# EAGLE board Integrated_final (EAGLE 9.5.2)
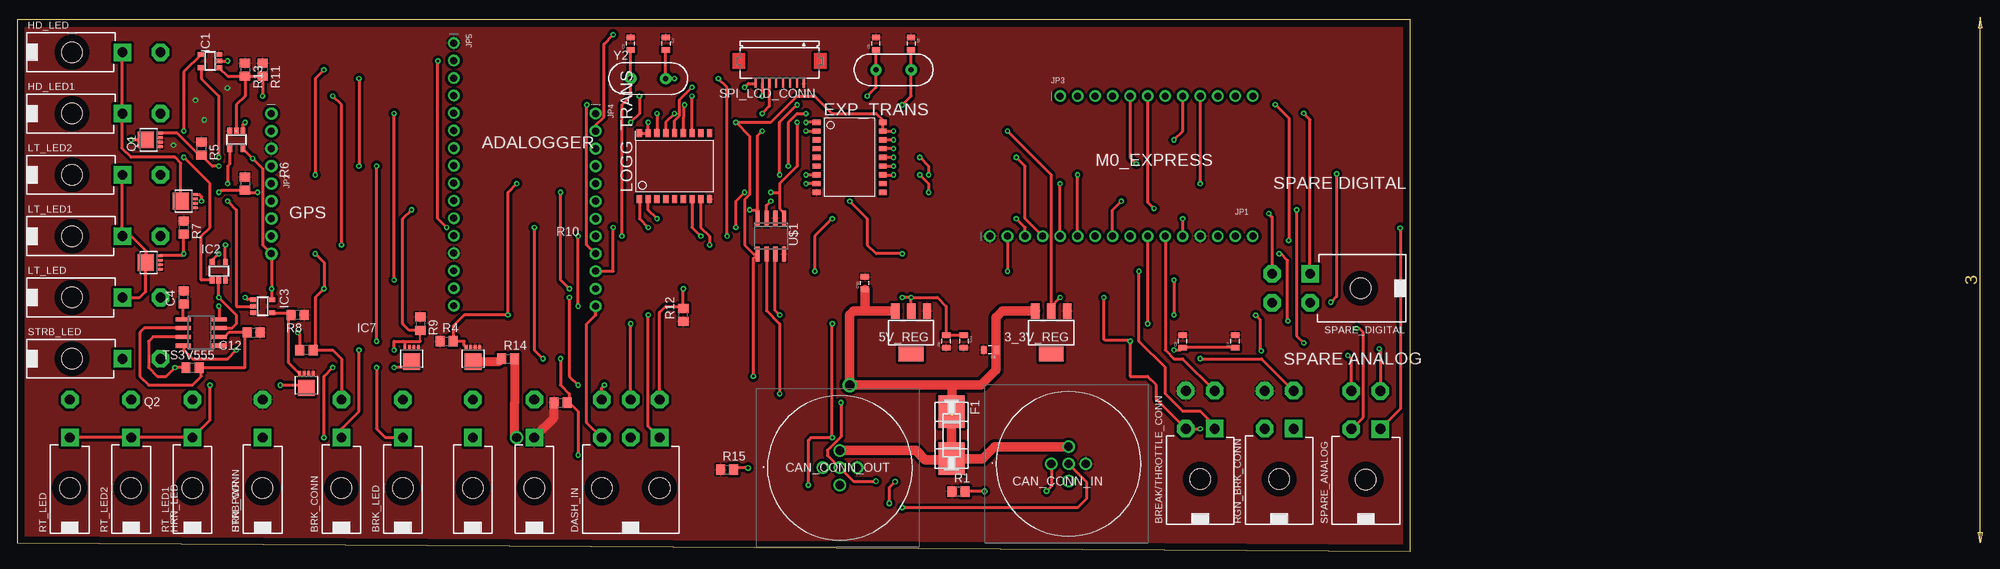
[diagram p0: board, top side]
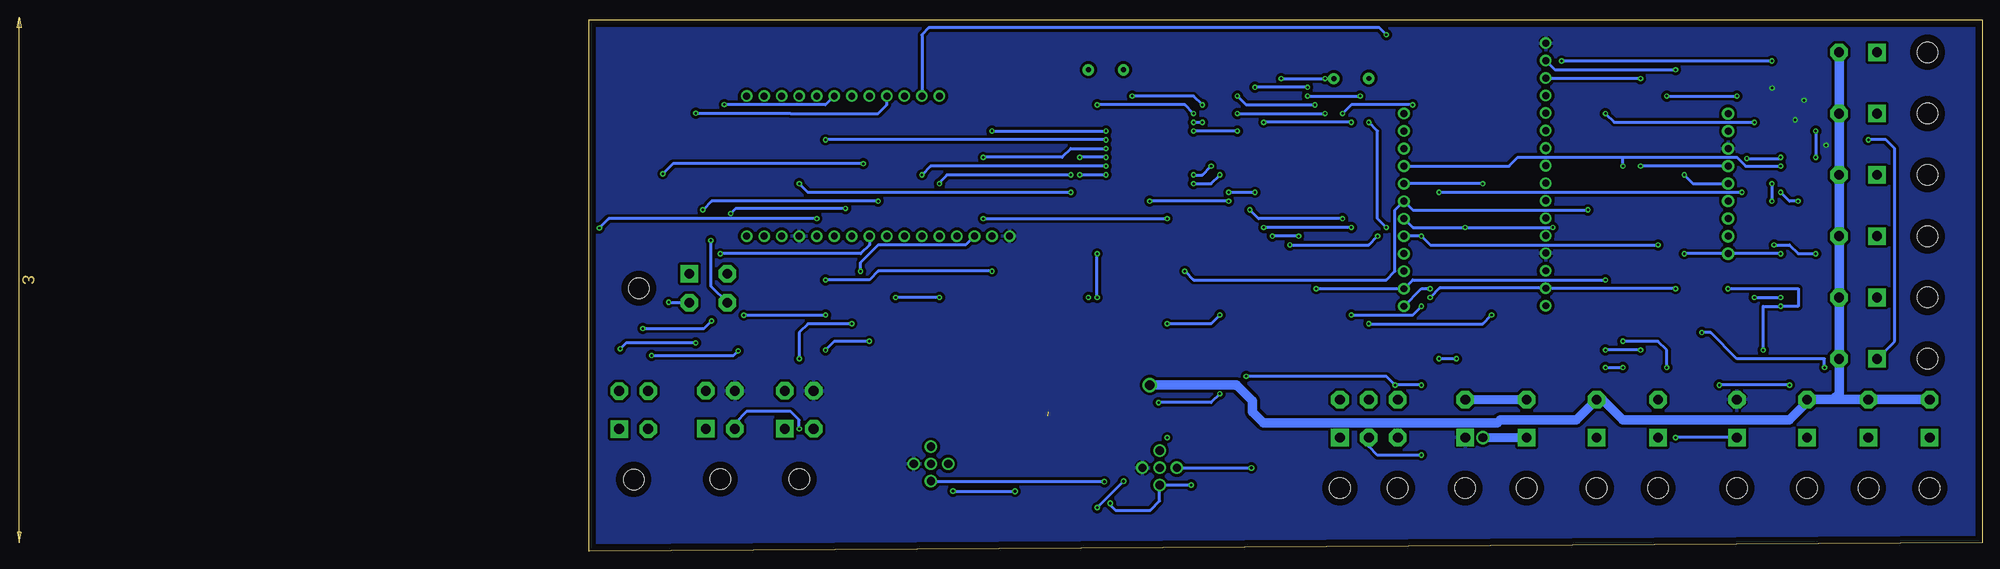
[diagram p1: board, bottom side, seen from below]

Size 201.91 x 77.14 mm. Coordinates in mm from the lower left corner, seen from the top.
Outline: 0,1.27 201.91,0 201.91,77.14 0,77.14 0,1.27
Copper layers (1*16): Top 0.035mm / dielectric 1.5mm / Bottom 0.035mm
Design rules "default": minimum track width 6mil, minimum drill 0.35mm, track to track 6mil, track to pad 6mil, pad to pad 6mil, via to via 6mil, smd to smd 6mil, copper to edge 40mil, drill to drill 6mil, minimum pad ring 10mil, minimum via ring 8mil, stop-mask expansion 4mil, vias tented up to drill 0mil, thermal gap 10mil

## Footprints (pad centres in the part's own frame; a part is rotated, then mirrored left to right if it is on the bottom)
SOT223 = smd 1.219 x 2.235: 1 -2.311,-3.099; 2 0,-3.099; 3 2.311,-3.099 | smd 3.6 x 2.2: 4 0,3.099
39-30-?04? = drill 1.422 pad 2.54 square: 1 2.095,0 | drill 1.422 pad 2.54 octagon: 2 -2.095,0; 3 2.095,5.512; 4 -2.095,5.512 | hole 3: 0,-7.3
39-30-?02? = drill 1.422 pad 2.54 square: 1 0,0 | drill 1.422 pad 2.54 octagon: 2 0,5.512 | hole 3: 0,-7.3
0805 = smd 0.8 x 1.2: 1 -0.9,0; 2 0.9,0
C0805 = smd 1.3 x 1.5: 1 -0.95,0; 2 0.95,0
1200845179 = drill 1.2 pad 1.8: 1 0,0; 2 2.5,2.5; 3 5,0; 4 2.5,-2.5; 5 2.5,0
39-30-?06? = drill 1.422 pad 2.54 square: 1 4.191,0 | drill 1.422 pad 2.54 octagon: 2 0,0; 3 -4.191,0; 4 4.191,5.512; 5 0,5.512; 6 -4.191,5.512 | hole 3: -4.191,-7.3; 4.191,-7.3
SO-18W = smd 0.762 x 1.143: 1 -5.08,-4.788; 2 -3.81,-4.788; 3 -2.54,-4.788; 4 -1.27,-4.788; 5 0,-4.788; 6 1.27,-4.788; 7 2.54,-4.788; 8 3.81,-4.788; 9 5.08,-4.788; 10 5.08,4.788; 11 3.81,4.788; 12 2.54,4.788; 13 1.27,4.788; 14 0,4.788; 15 -1.27,4.788; 16 -2.54,4.788; 17 -3.81,4.788; 18 -5.08,4.788
OMNIBLOK = smd 4.7 x 3.8: P$1 -3.4,0; P$2 3.4,0
SOT23-5 = smd 0.69 x 0.99: 1 -0.95,-1.29; 2 0,-1.29; 3 0.95,-1.29; 4 0.95,1.3; 5 -0.95,1.3
1X16_ROUND = drill 1 pad 1.676: 1 -19.05,0; 2 -16.51,0; 3 -13.97,0; 4 -11.43,0; 5 -8.89,0; 6 -6.35,0; 7 -3.81,0; 8 -1.27,0; 9 1.27,0; 10 3.81,0; 11 6.35,0; 12 8.89,0; 13 11.43,0; 14 13.97,0; 15 16.51,0; 16 19.05,0
1X09_ROUND_70 = drill 1 pad 1.778: 1 -10.16,0; 2 -7.62,0; 3 -5.08,0; 4 -2.54,0; 5 0,0; 6 2.54,0; 7 5.08,0; 8 7.62,0; 9 10.16,0
1X12_ROUND = drill 1 pad 1.676: 1 -13.97,0; 2 -11.43,0; 3 -8.89,0; 4 -6.35,0; 5 -3.81,0; 6 -1.27,0; 7 1.27,0; 8 3.81,0; 9 6.35,0; 10 8.89,0; 11 11.43,0; 12 13.97,0
LFPAK33 = smd 0.4 x 0.8: 1 -0.975,-1.625; 2 -0.325,-1.625; 3 0.325,-1.625; 4 0.975,-1.625 | smd 2.45 x 2.35: MB 0,0.425
R0805 = smd 1.3 x 1.5: 1 -0.95,0; 2 0.95,0
FH12-08S-1SH = smd 0.3 x 1.3: 1 -3.5,3.25; 2 -2.5,3.25; 3 -1.5,3.25; 4 -0.5,3.25; 5 0.5,3.25; 6 1.5,3.25; 7 2.5,3.25; 8 3.5,3.25
SO08 = smd 0.6 x 2.2: 1 -1.905,-2.6; 2 -0.635,-2.6; 3 0.635,-2.6; 4 1.905,-2.6; 5 1.905,2.6; 6 0.635,2.6; 7 -0.635,2.6; 8 -1.905,2.6
SOIC8 = smd 0.6 x 2.2: 1 -1.905,-2.6; 2 -0.635,-2.6; 3 0.635,-2.6; 4 1.905,-2.6; 5 1.905,2.6; 6 0.635,2.6; 7 -0.635,2.6; 8 -1.905,2.6
HC49US = drill 0.7 pad 1.651: 1 -2.54,0; 2 2.54,0

## Placement (x,y rotation side)
3_3V_REG  NCP1117ST33T3G  [SOT223]  149.86,31.75 180 top
5V_REG  NCP1117ST50T3G  [SOT223]  129.54,31.75 180 top
BREAK/THROTTLE_CONN  39-30-04?  [39-30-?04?]  171.45,17.78 0 top
BRK_CONN  39-30-02?  [39-30-?02?]  46.99,16.51 0 top
BRK_LED  39-30-02?  [39-30-?02?]  55.88,16.51 0 top
C1  18 pF  [0805]  93.98,73.66 270 top
C2  18 pF  [0805]  88.9,73.66 90 top
C3  10µF  [0805]  140.97,29.21 180 top
C4  10nF  [C0805]  24.13,36.83 90 top
C5  18 pF  [0805]  129.54,73.66 270 top
C6  18 pF  [0805]  124.46,73.66 90 top
C7  .1µF  [0805]  176.53,30.48 90 top
C8  .1µF  [0805]  134.62,30.48 90 top
C9  10µF  [0805]  168.91,30.48 90 top
C10  10µF  [0805]  122.83,38.92 90 top
C11  10µF  [0805]  137.16,30.48 270 top
C12  2.2uF  [C0805]  34.29,31.75 0 top
CAN_CONN_IN  1200845179  [1200845179]  149.86,12.7 0 top
CAN_CONN_OUT  1200845179  [1200845179]  116.72,12.14 0 top
DASH_IN  39-30-06?  [39-30-?06?]  88.9,16.51 0 top
EXP_TRANS  MCP2515  [SO-18W]  120.65,57.15 270 top
F1  SMD-MICRO-FUSE-BLOCK  [OMNIBLOK]  135.4,16.85 270 top
HD_LED  39-30-02?  [39-30-?02?]  15.24,72.39 270 top
HD_LED1  39-30-02?  [39-30-?02?]  15.24,63.5 270 top
HRN_LED  39-30-02?  [39-30-?02?]  66.04,16.51 0 top
HRN_PWR  39-30-02?  [39-30-?02?]  74.93,16.51 0 top
IC1  74AHC1G32DBV  [SOT23-5]  27.94,71.12 90 top
IC2  74AHC1G08DBV  [SOT23-5]  29.21,40.64 0 top
IC3  74AHC1G08DBV  [SOT23-5]  35.56,35.56 270 top
IC7  74AHC1G32DBV  [SOT23-5]  31.75,59.69 180 top
JP1  [1X16_ROUND]  160.02,45.72 0 top
JP2  [1X09_ROUND_70]  36.83,53.34 270 top
JP3  [1X12_ROUND]  165.1,66.04 0 top
JP4  [1X12_ROUND]  83.82,49.53 270 top
JP5  [1X16_ROUND]  63.27,54.68 270 top
LOGG_TRANS  MCP2515  [SO-18W]  95.25,55.88 0 top
LT_LED  39-30-02?  [39-30-?02?]  15.24,36.83 270 top
LT_LED1  39-30-02?  [39-30-?02?]  15.24,45.72 270 top
LT_LED2  39-30-02?  [39-30-?02?]  15.24,54.61 270 top
Q1  PSMN013-30MLC  [LFPAK33]  19.05,59.69 90 top
Q2  PSMN013-30MLC  [LFPAK33]  41.91,24.13 180 top
Q3  PSMN013-30MLC  [LFPAK33]  66.04,27.94 180 top
Q4  PSMN013-30MLC  [LFPAK33]  19.05,41.91 90 top
Q5  PSMN013-30MLC  [LFPAK33]  57.15,27.94 180 top
Q6  PSMN013-30MLC  [LFPAK33]  24.13,50.8 90 top
R1  0  [R0805]  136.39,8.71 0 top
R2  220K  [R0805]  25.4,26.67 0 top
R3  100K  [R0805]  41.91,29.21 180 top
R4  1K  [R0805]  62.23,30.48 0 top
R5  1K  [R0805]  26.67,58.42 270 top
R6  1K  [R0805]  33.02,53.34 270 top
R7  1K  [R0805]  24.13,46.99 270 top
R8  1K  [R0805]  40.64,34.29 180 top
R9  1K  [R0805]  58.42,33.02 270 top
R10  1K  [R0805]  78.74,21.59 0 top
R11  1K  [R0805]  35.56,69.85 270 top
R12  1K  [R0805]  96.52,34.29 90 top
R13  1K  [R0805]  33.02,69.85 270 top
R14  1K  [R0805]  71.12,27.94 0 top
R15  0  [R0805]  102.85,11.87 0 top
RGN_BRK_CONN  39-30-04?  [39-30-?04?]  182.88,17.78 0 top
RT_LED  39-30-02?  [39-30-?02?]  7.62,16.51 0 top
RT_LED1  39-30-02?  [39-30-?02?]  25.4,16.51 0 top
RT_LED2  39-30-02?  [39-30-?02?]  16.51,16.51 0 top
SPARE_ANALOG  39-30-04?  [39-30-?04?]  195.45,17.75 0 top
SPARE_DIGITAL  39-30-04?  [39-30-?04?]  187.38,38.17 90 top
SPI_LCD_CONN  FH12-08S-1SH  [FH12-08S-1SH]  110.49,71.12 180 top
STRB_CONN  39-30-02?  [39-30-?02?]  35.56,16.51 0 top
STRB_LED  39-30-02?  [39-30-?02?]  15.24,27.94 270 top
TS3V555  LM555D  [SO08]  26.67,31.75 90 top
U$1  MCP2562  [SOIC8]  109.22,45.72 180 top
Y1  [HC49US]  127,69.85 0 top
Y2  [HC49US]  91.44,68.58 359.6 top

## Library data of the parts
3_3V_REG 5V_REG EXP_TRANS LOGG_TRANS U$1 = NUSOLAR_Custom
BREAK/THROTTLE_CONN BRK_CONN BRK_LED DASH_IN HD_LED HD_LED1 HRN_LED HRN_PWR LT_LED LT_LED1 LT_LED2 RGN_BRK_CONN RT_LED RT_LED1 RT_LED2 SPARE_ANALOG SPARE_DIGITAL STRB_CONN STRB_LED = con-molex-mini-fit
C1-C3 C5-C11 = SparkFun-Capacitors
C4 C12 = eagle-ltspice; SPICEMODEL: NONE; SPICEPREFIX: C
CAN_CONN_IN CAN_CONN_OUT = SamacSys_Parts; DESCRIPTION: REC U12 5P AC FE M16 BM SOL SHD; HEIGHT: 24.8mm; MANUFACTURER_NAME: Molex; MANUFACTURER_PART_NUMBER: 1200845179; MOUSER_PART_NUMBER: 538-1200845179; MOUSER_PRICE-STOCK: https://www.mouser.com/Search/Refine.aspx?Keyword=538-1200845179
F1 = f-lf-omniblok-s
IC1-IC3 IC7 = 74xx-little-us
JP1-JP5 = microbuilder
Q1-Q6 = transistor-power; MPN: PSMN013-30MLC; OC_FARNELL: 2115260; OC_NEWARK: 05W5709
R1-R15 = rcl
SPI_LCD_CONN = con-hirose; OC_FARNELL: unknown; OC_NEWARK: unknown
TS3V555 = linear
Y1 Y2 = SparkFun-FreqCtrl

## Nets
1PPS: JP2.1
3.3V: 3_3V_REG.2 BREAK/THROTTLE_CONN.2 BRK_CONN.2 C7.1 C9.1 DASH_IN.6 EXP_TRANS.17 EXP_TRANS.18 IC1.5 IC2.5 IC3.5 IC7.5 JP2.9 JP5.15 LOGG_TRANS.17 LOGG_TRANS.18 R3.1 RGN_BRK_CONN.2 TS3V555.4 TS3V555.8 U$1.5
5V: 5V_REG.2 C8.2 C11.1 U$1.3
12V: 3_3V_REG.3 5V_REG.3 BRK_LED.2 C3.1 C10.1 CAN_CONN_IN.2 CAN_CONN_OUT.2 F1.P$1 F1.P$2 HD_LED1.2 HD_LED.2 LT_LED1.2 LT_LED2.2 LT_LED.2 RT_LED1.2 RT_LED2.2 RT_LED.2 STRB_LED.2
!RESET: JP1.16
!RESET_LOG: JP5.16
A0: JP1.12 SPARE_ANALOG.1
A0(LOG): JP5.12
A1(LOG): JP5.11
A2(LOG): JP5.10
A3: JP1.9 SPARE_ANALOG.2
A3(LOG): JP5.9
A4: JP1.8 SPARE_ANALOG.3
A4(LOG): JP5.8
A5: JP1.7
A5(LOG): JP5.7
AREF: JP1.14
AREF_LOG: JP5.14
BRK: BREAK/THROTTLE_CONN.1 BRK_CONN.1 JP1.3 JP4.6 Q5.4 R9.2
CAN_CS: EXP_TRANS.16 JP3.8
CAN_CS_LOG: JP4.9 LOGG_TRANS.16
CAN_H: CAN_CONN_IN.4 CAN_CONN_OUT.4 U$1.7
CAN_INT: EXP_TRANS.12 JP3.9
CAN_INT_LOG: JP4.10 LOGG_TRANS.12
CAN_L: CAN_CONN_IN.5 CAN_CONN_OUT.5 U$1.6
CAN_RX: EXP_TRANS.2 LOGG_TRANS.2 U$1.4
CAN_SHIELD: CAN_CONN_OUT.1 R15.2
CAN_SHIELD_2: CAN_CONN_IN.1 R1.2
CAN_TX: EXP_TRANS.1 LOGG_TRANS.1 U$1.1
CSC_LOG: SPI_LCD_CONN.5
D0: JP1.2 SPARE_ANALOG.4
D9(LOG): DASH_IN.1 IC1.1 IC7.2 JP4.8 R11.2 R13.2
D10: JP3.7 SPARE_DIGITAL.4
D10(LOG): DASH_IN.2 IC1.2 JP4.7 R10.2
D11: JP3.6 SPARE_DIGITAL.3
D12: JP3.5 SPARE_DIGITAL.2
D12(LOG): DASH_IN.5 JP4.5 Q3.4 R4.2
D13: JP3.4 SPARE_DIGITAL.1
D13(LOG): JP4.4 Q1.4 R5.2 STRB_CONN.1
EN: JP3.2 JP4.2
ENABLE: JP2.8
FIX: JP2.6
GND: 3_3V_REG.1 5V_REG.1 BREAK/THROTTLE_CONN.4 C1.1 C2.2 C3.2 C4.2 C5.1 C6.2 C7.2 C8.1 C9.2 C10.2 C11.2 C12.2 CAN_CONN_IN.3 CAN_CONN_OUT.3 EXP_TRANS.9 HRN_PWR.1 IC1.3 IC2.3 IC3.3 IC7.3 JP1.1 JP1.13 JP2.3 JP5.1 JP5.13 LOGG_TRANS.9 Q1.1 Q1.2 Q1.3 Q2.1 Q2.2 Q2.3 Q3.1 Q3.2 Q3.3 Q4.1 Q4.2 Q4.3 Q5.1 Q5.2 Q5.3 Q6.1 Q6.2 Q6.3 R1.1 R4.1 R5.1 R6.1 R7.1 R8.1 R9.1 R10.1 R11.1 R12.1 R13.1 R15.1 RGN_BRK_CONN.4 SPI_LCD_CONN.1 STRB_CONN.2 TS3V555.1 U$1.2 U$1.8
MISO: EXP_TRANS.15 JP1.4
MISO(LOG): JP5.4
MISO_LOG: LOGG_TRANS.15 SPI_LCD_CONN.6
MOSI: EXP_TRANS.14 JP1.5
MOSI(LOG): JP5.5
MOSI_LOG: LOGG_TRANS.14 SPI_LCD_CONN.8
N$1: C5.2 EXP_TRANS.7 Y1.2
N$3: C2.1 LOGG_TRANS.8 Y2.1
N$4: SPI_LCD_CONN.2
N$5: SPI_LCD_CONN.3
N$6: C1.2 LOGG_TRANS.7 Y2.2
N$8: R2.1 R3.2 TS3V555.7
N$9: C12.1 R2.2 TS3V555.2 TS3V555.6
N$10: IC2.2 IC3.1 TS3V555.3
N$11: C6.1 EXP_TRANS.8 Y1.1
N$15: IC2.4 Q4.4 R7.2
N$16: IC3.4 Q2.4 R8.2
N$17: LT_LED1.1 LT_LED2.1 LT_LED.1 Q4.MB
N$18: Q2.MB RT_LED1.1 RT_LED2.1 RT_LED.1
N$19: HD_LED1.1 HD_LED.1 Q6.MB
N$24: Q1.MB STRB_LED.1
N$25: BRK_LED.1 Q5.MB
N$28: IC1.4 IC2.1
N$29: IC3.2 IC7.4
N$31: HRN_LED.2 HRN_PWR.2
N$32: HRN_LED.1 R14.2
N$33: Q3.MB R14.1
PWR: SPI_LCD_CONN.4
RGN_BRK: JP1.10 RGN_BRK_CONN.3
RX: JP2.4 JP5.3
SCK: EXP_TRANS.13 JP1.6
SCK(LOG): JP5.6
SCK_LOG: LOGG_TRANS.13 SPI_LCD_CONN.7
SCL: JP3.11
SCL_LOG: DASH_IN.4 IC7.1 JP4.11 R12.2
SDA: JP3.12
SDA_LOG: DASH_IN.3 JP4.12 Q6.4 R6.2
STROBE: JP3.10
THROTTLE: BREAK/THROTTLE_CONN.3 JP1.11
TS3V555: C4.1 TS3V555.5
TX: JP2.5 JP5.2
VBACKUP: JP2.7
VBAT: JP3.1
VBAT_LOG: JP4.1
VBUS: JP3.3
VBUS_LOG: JP4.3
VIN: JP2.2

## Tracks (layer width: path | path; a pad name or v marks a point on that pad's centre or on a via)
3.3V  (via drill 0.35)
  Top 0.406: C7.1 C9.1 168.54,29.21 v167.64,29.21 | v171.45,17.78 BREAK/THROTTLE_CONN.2 165.1,22.04 165.1,24.13 163.83,25.4 161.29,25.4 v161.29,30.48 161.13,30.64 157.64,30.64 157.48,30.8 v157.48,36.83 | v151.13,36.83 149.86,35.56 3_3V_REG.2 149.86,54.61 v143.51,60.96 | v127,60.96 EXP_TRANS.17 EXP_TRANS.18 125.44,62.52 124.46,63.5 118.11,63.5 115.57,66.04 113.03,66.04 109.22,62.23 v104.14,62.23 106.14,60.23 106.14,51.77 105.41,51.03 105.41,44.45 106.74,43.12 U$1.5 106.68,42.48 v106.68,25.4 | DASH_IN.6 84.71,23.75 v85.09,24.13 | v80.01,36.83 80.01,25.4 v81.28,24.13 | LOGG_TRANS.18 LOGG_TRANS.17 v91.44,62.23 | v43.18,43.18 44.45,41.91 v44.45,38.1 43.18,36.83 43.18,29.53 R3.1 45.72,29.21 46.99,27.94 BRK_CONN.2 | IC3.5 v36.86,38.1 36.86,43.15 JP2.9 35.56,44.45 35.56,55.53 v34.12,56.98 IC7.5 | IC2.5 28.26,42.23 v29.21,43.18 | IC1.5 26.67,70.14 26.67,68.58 29.21,66.04 v29.21,57.15 | TS3V555.8 24.13,29.79 24.13,29.21 25.4,27.94 30.48,27.94 v31.75,29.21 | v29.21,35.56 29.27,35.5 TS3V555.4
  Bottom 0.406: v171.45,17.78 171.45,19.05 172.72,20.32 179.07,20.32 180.78,18.61 RGN_BRK_CONN.2 | v151.13,36.83 v157.48,36.83 | v143.51,60.96 v127,60.96 | v106.68,25.4 86.36,25.4 v85.09,24.13 v81.28,24.13 | v80.01,36.83 78.67,38.17 JP5.15 44.52,38.17 v44.45,38.1 | v91.44,62.23 v104.14,62.23 | v43.18,43.18 JP2.9 v29.21,43.18 | v161.29,30.48 166.37,30.48 v167.64,29.21 | v34.12,56.98 29.38,56.98 v29.21,57.15 | v31.75,29.21 31.75,35.56 v29.21,35.56 26.67,35.56 26.67,38.1 v36.86,38.1
5V  (via drill 0.35)
  Top 0.406: 5V_REG.2 v129.54,36.83 | v129.54,36.83 133.35,36.83 134.62,35.56 C8.2 C11.1 | v129.54,36.83 v128.27,36.83 | v128.27,43.18 124.46,43.18 123.19,44.45 123.19,48.26 v120.65,50.8 | U$1.3 108.59,50.16 v109.22,50.8
  Bottom 0.406: v128.27,36.83 v128.27,43.18 | v109.22,50.8 v120.65,50.8
12V  (via drill 1.4)  (1 unrouted)
  Top 1.397: 3_3V_REG.3 142.8,34.85 141.87,33.92 C3.1 141.87,26.3 139.7,24.13 135.48,24.13 | 135.48,24.13 v120.65,24.13 120.65,34.29 121.21,34.85 122.49,34.85 | 122.49,34.85 5V_REG.3 | CAN_CONN_OUT.2 130.24,14.64 131.58,13.3 135.25,13.3 F1.P$2 | F1.P$2 139.89,13.45 141.64,15.2 CAN_CONN_IN.2 | F1.P$1 135.48,20.33 135.48,24.13 | C10.1 122.83,35.19 122.49,34.85 | F1.P$2 135.4,19.61 135.48,19.69
  Bottom 1.397: 21.59,22.02 RT_LED1.2 25.4,21.59 27.94,19.05 52.07,19.05 55.04,22.02 BRK_LED.2 58.85,19.05 69.85,19.05 70.27,18.63 104.18,18.63 105.77,20.22 105.77,21.82 108.08,24.13 108.16,24.13 | 21.59,22.02 RT_LED2.2 RT_LED.2 | 21.59,22.02 20.75,22.86 STRB_LED.2 LT_LED.2 LT_LED1.2 LT_LED2.2 HD_LED1.2 HD_LED.2 | v120.65,24.13 108.16,24.13 | 108.16,24.13 108,23.97
A0  (via drill 0.35)
  Top 0.406: JP1.12 v168.91,48.26 | v200.43,46.9 200.43,20.65 SPARE_ANALOG.1
  Bottom 0.406: v200.43,46.9 199.07,48.26 v168.91,48.26
A3  (via drill 0.35)
  Top 0.406: SPARE_ANALOG.2 195.07,19.48 195.07,31.74 194.49,32.32 v194.1,32.32 | v184.15,33.42 184.09,33.48 184.09,42.22 183.12,43.18 v182.88,43.18
  Bottom 0.406: JP1.9 161.29,44.45 162.56,43.18 v182.88,43.18 | v194.1,32.32 185.25,32.32 v184.15,33.42
A4  (via drill 0.35)
  Top 0.406: JP1.8 158.75,49.53 v160.02,50.8 | v185.42,49.53 185.42,31.28 v186.46,30.24 | v197.4,29.38 197.54,29.24 SPARE_ANALOG.3
  Bottom 0.406: v160.02,50.8 184.15,50.8 v185.42,49.53 | v186.46,30.24 196.55,30.24 v197.4,29.38
BRK  (via drill 0.35)
  Top 0.254: 55.88,30.48 56.17,30.19 | 58.42,30.48 58.42,31.75 58.26,31.91
  Top 0.406: BREAK/THROTTLE_CONN.1 172.72,18.61 172.72,19.05 171.45,20.32 168.91,20.32 166.37,22.86 166.37,26.67 162.56,30.48 v162.56,40.64 | BRK_CONN.1 46.99,17.78 49.53,20.32 v49.53,29.21 | v57.15,49.53 55.88,48.26 55.88,33.02 56.83,32.07 R9.2 58.26,31.91 | v115.57,40.64 115.57,45.72 v118.11,48.26 | v54.61,29.21 54.61,30.48 55.88,30.48 58.42,30.48 | 56.17,30.19 Q5.4 | JP1.3 146.05,46.99 v144.78,48.26
  Bottom 0.406: v162.56,40.64 162.56,41.91 160.02,44.45 147.32,44.45 JP1.3 | v49.53,29.21 v54.61,29.21 | v57.15,49.53 82.55,49.53 JP4.6 85.09,49.53 85.09,40.64 86.36,39.37 114.3,39.37 v115.57,40.64 | v144.78,48.26 v118.11,48.26
CAN_CS  (via drill 0.35)
  Top 0.406: EXP_TRANS.16 v127,59.69 | v167.64,59.69 168.91,60.96 JP3.8
  Bottom 0.406: v127,59.69 v167.64,59.69
CAN_CS_LOG  (via drill 0.35)
  Top 0.406: JP4.9 82.55,44.45 v82.55,64.77 | v92.71,63.5 LOGG_TRANS.16
  Bottom 0.406: v82.55,64.77 91.44,64.77 v92.71,63.5
CAN_H  (via drill 0.35, 0.41)
  Top 0.406: v110.49,34.29 109.85,34.93 U$1.7 | v118.11,33.02 v118.11,16.51 115.04,16.51 114.64,16.12 v114.64,9.62 | v127.22,10.11 126.37,9.26 v126.37,6.99
  Bottom 0.406: v110.49,34.29 111.76,33.02 v118.11,33.02 | v114.64,9.62 114.66,9.64 CAN_CONN_OUT.4 119.22,7.33 120.57,5.98 125.64,5.98 126.37,6.7 v126.37,6.99 | CAN_CONN_IN.4 127.31,10.2 v127.22,10.11
CAN_INT  (via drill 0.35)
  Top 0.406: EXP_TRANS.12 v127,54.61 | v130.81,54.61 132.08,53.34 v132.08,52.07 | v171.45,53.34 JP3.9
  Bottom 0.406: v127,54.61 v130.81,54.61 | v171.45,53.34 170.18,52.07 v132.08,52.07
CAN_INT_LOG  (via drill 0.35)
  Top 0.406: JP4.10 86.36,40.64 v86.36,46.99 | LOGG_TRANS.12 v97.79,66.04 | v90.17,66.04 90.17,63.5 v88.9,62.23
  Bottom 0.406: v86.36,46.99 87.63,48.26 87.63,60.96 v88.9,62.23 | v97.79,66.04 v90.17,66.04
CAN_L  (via drill 0.35, 0.41)
  Top 0.406: v110.49,22.86 110.49,33.02 108.59,34.93 U$1.6 | v128.27,6.35 153.67,6.35 154.94,7.62 154.94,10.12 CAN_CONN_IN.5 | v124.44,10.18 121.18,10.18 CAN_CONN_OUT.5 117.42,13.93 117.42,14.67 119.38,16.63 v119.38,21.59
  Bottom 0.406: v110.49,22.86 111.76,21.59 v119.38,21.59 | v128.27,6.35 v124.44,10.18
CAN_RX  (via drill 0.35)
  Top 0.406: v92.71,48.26 91.44,49.53 LOGG_TRANS.2 | U$1.4 107.31,49.53 | 107.31,49.53 107.31,60.33 v107.95,60.96 | v114.3,60.96 EXP_TRANS.2 | v106.14,49.53 107.31,49.53
  Bottom 0.406: v107.95,60.96 v114.3,60.96 | v106.14,49.53 104.87,48.26 v92.71,48.26
CAN_SHIELD  (via drill 0.41)
  Top 0.406: v105.92,12.12 104.05,12.12 R15.2
  Bottom 0.406: CAN_CONN_OUT.1 105.94,12.14 v105.92,12.12
CAN_SHIELD_2  (via drill 0.41)
  Top 0.406: CAN_CONN_IN.1 149.86,9.43 v149.17,8.75 | v140.18,8.73 137.36,8.73 R1.2
  Bottom 0.406: v149.17,8.75 140.2,8.75 v140.18,8.73
CAN_TX  (via drill 0.35)
  Top 0.406: U$1.1 111.12,49.09 110.49,49.73 110.49,52.07 | LOGG_TRANS.1 90.17,48.26 v91.44,46.99 | EXP_TRANS.1 v114.3,62.23 | v113.03,62.23 113.03,55.88 110.49,53.34 110.49,52.07 | v105.41,52.07 104.14,50.8 v104.14,46.99 | v109.22,52.07 110.49,52.07
  Bottom 0.406: v91.44,46.99 v104.14,46.99 | v114.3,62.23 v113.03,62.23 | v105.41,52.07 v109.22,52.07
D0  (via drill 0.35)
  Top 0.406: JP1.2 v143.51,40.64 | v167.64,39.37 v167.64,34.29 | SPARE_ANALOG.4 193.35,27.91 v192.84,28.41 | v180.31,29.08 180.14,29.25 180.14,33.6 v179.47,34.27
  Bottom 0.406: v143.51,40.64 160.02,40.64 161.29,39.37 v167.64,39.37 | v167.64,34.29 176.53,34.29 176.55,34.27 v179.47,34.27 | v192.84,28.41 180.98,28.41 v180.31,29.08
D9(LOG)  (via drill 0.35)
  Top 0.406: DASH_IN.1 91.44,18.16 v91.44,34.29 | v81.28,35.56 v81.28,45.72 | IC1.1 30.5,68.9 R13.2 | R13.2 R11.2 v35.56,66.04 | R13.2 33.02,66.04 31.75,64.77 IC7.2 | v46.99,44.45 46.99,64.77 v45.72,66.04
  Bottom 0.406: v91.44,34.29 82.55,34.29 v81.28,35.56 | JP4.8 v81.28,45.72 80.01,44.45 v46.99,44.45 | v45.72,66.04 v35.56,66.04
D10  (via drill 0.35)
  Top 0.406: v182.31,64.8 184.27,62.84 v184.27,45.1
  Bottom 0.406: JP3.7 167.64,64.77 182.28,64.77 v182.31,64.8 | v184.27,45.1 184.27,38.49 SPARE_DIGITAL.4
D10(LOG)  (via drill 0.35)
  Top 0.406: R10.2 80.01,21.59 | 80.01,21.59 81.28,20.32 v81.28,13.97 | v74.93,46.99 74.93,29.21 v76.2,27.94 | v78.74,27.94 78.74,24.13 80.01,22.86 80.01,21.59 | v62.23,46.99 60.96,48.26 v60.96,71.12 | IC1.2 v30.48,71.12
  Bottom 0.406: v81.28,13.97 87.63,13.97 88.9,15.24 DASH_IN.2 | JP4.7 82.55,46.99 v74.93,46.99 v62.23,46.99 | v76.2,27.94 v78.74,27.94 | v30.48,71.12 v60.96,71.12
D11  (via drill 0.35)
  Top 0.406: JP3.6 163.83,50.65 v164.75,49.73 | v181.39,48.99 181.86,48.52 SPARE_DIGITAL.3
  Bottom 0.406: v164.75,49.73 180.65,49.73 v181.39,48.99
D12  (via drill 0.35)
  Top 0.406: JP3.5 161.29,57.11 v162.17,56.23 | v191.21,54.76 191.21,36.97 v190.37,36.13
  Bottom 0.406: v162.17,56.23 189.74,56.23 v191.21,54.76 | v190.37,36.13 190.33,36.08 SPARE_DIGITAL.2
D12(LOG)  (via drill 0.35)
  Top 0.406: DASH_IN.5 v88.9,33.02 | v72.39,53.34 71.12,52.07 v71.12,34.29 64.77,34.29 63.18,32.7 R4.2 64.77,30.48 64.77,29.86 Q3.4
  Bottom 0.406: v88.9,33.02 72.39,33.02 v71.12,34.29 | v72.39,53.34 JP4.5
D13  (via drill 0.35)
  Top 0.406: SPARE_DIGITAL.1 187.38,62.6 v186.43,63.54
  Bottom 0.406: JP3.4 158.75,64.77 160.02,63.5 172.72,63.5 172.76,63.54 v186.43,63.54
D13(LOG)  (via drill 0.35)
  Top 0.406: v29.21,55.88 28.26,55.88 26.83,57.31 R5.2 26.35,57.47 23.16,60.66 Q1.4 | v44.45,16.51 44.45,25.4 v45.72,26.67 | v52.07,30.48 v52.07,55.88
  Bottom 0.406: JP4.4 68.58,55.88 67.31,57.15 52.07,57.15 | 52.07,57.15 35.56,57.15 34.29,55.88 v29.21,55.88 | STRB_CONN.1 v44.45,16.51 | v45.72,26.67 45.72,29.21 46.99,30.48 v52.07,30.48 | v52.07,55.88 52.07,57.15
EN  (via drill 0.35)
  Top 0.406: JP4.2 83.82,61.81 85.01,63.01 85.01,73.58 v86.36,74.93
  Bottom 0.406: v86.36,74.93 87.35,75.92 152.68,75.92 153.67,74.93 JP3.2
GND  (via drill 0.35)
  Top 1.27: HRN_PWR.1 77.79,19.37 R10.1
  other vias: 25.83,65.43 27.11,62.59 30.47,67.2 22.64,58.92
  pour Top (isolate 0.406): 0,76.2 0,0 201.93,0 201.93,76.2
  pour Bottom (isolate 0.406): 0,77.47 0,-0.07 201.93,-0.07 201.93,77.47
MISO  (via drill 0.35)
  Top 0.406: v127,58.42 EXP_TRANS.15 | JP1.4 146.05,48.26 146.05,55.88 v144.78,57.15
  Bottom 0.406: v127,58.42 132.08,58.42 133.35,57.15 v144.78,57.15
MISO_LOG  (via drill 0.35)
  Top 0.406: SPI_LCD_CONN.6 108.99,64.54 v107.95,63.5 | v95.25,63.5 93.98,62.23 LOGG_TRANS.15
  Bottom 0.406: v107.95,63.5 v95.25,63.5
MOSI  (via drill 0.35)
  Top 0.406: EXP_TRANS.14 v127,57.15 | v130.81,57.15 132.08,55.88 v132.08,54.61 | JP1.5 v151.13,53.34
  Bottom 0.406: v127,57.15 v130.81,57.15 | v132.08,54.61 150.03,54.61 151.13,53.52 v151.13,53.34
MOSI_LOG  (via drill 0.35)
  Top 0.406: LOGG_TRANS.14 95.25,62.46 95.98,63.2 95.98,65.5 v97.79,67.31 | v105.41,67.31 105.97,67.87 SPI_LCD_CONN.8
  Bottom 0.406: v97.79,67.31 v105.41,67.31
N$1  (via drill 0.35)
  Top 0.406: C5.2 Y1.2 129.54,66.04 v128.27,64.77 | EXP_TRANS.7 v114.3,54.61 | v111.76,55.88 111.76,62.23 113.03,63.5 v114.3,63.5
  Bottom 0.406: v114.3,63.5 115.57,64.77 v128.27,64.77 | v114.3,54.61 113.03,54.61 v111.76,55.88
N$3  (via drill 0.35)
  Top 0.406: LOGG_TRANS.8 99.06,46.99 100.33,45.72 v100.33,44.45 | v87.63,45.72 87.63,64.77 88.9,66.04 Y2.1 C2.1 | C2.1
  Bottom 0.406: v100.33,44.45 88.9,44.45 v87.63,45.72
N$6  (via drill 0.35)
  Top 0.406: v101.6,68.58 102.87,67.31 v102.87,45.72 | v95.25,68.58 95.23,68.56 Y2.2 C1.2 | LOGG_TRANS.7 97.79,46.99 v99.06,45.72 | C1.2
  Bottom 0.406: v101.6,68.58 v95.25,68.58 | v99.06,45.72 v102.87,45.72
N$8  (via drill 0.35)
  Top 0.406: R2.1 v22.86,26.67 21.59,25.4 20.32,25.4 19.05,26.67 19.05,30.48 19.68,31.12 TS3V555.7 | v40.64,31.75 40.96,31.43 R3.2
  Bottom 0.406: v22.86,26.67 22.86,27.94 35.56,27.94 39.37,31.75 v40.64,31.75
N$9
  Top 0.406: TS3V555.2 30.04,31.12 30.68,31.75 C12.1 33.02,31.43 33.02,26.67 26.67,26.67 | R2.2 26.67,26.67 | TS3V555.6 18.41,32.38 17.78,31.75 17.78,25.4 19.05,24.13 25.4,24.13 26.67,25.4 26.67,26.67
N$10  (via drill 0.35)
  Top 0.406: IC3.1 33.34,36.51 v33.02,36.83 | IC2.2 v29.21,36.83 31.75,34.29 31.75,33.02 31.12,32.38 TS3V555.3
  Bottom 0.406: v33.02,36.83 v29.21,36.83
N$11  (via drill 0.35)
  Top 0.406: C6.1 Y1.1 124.46,67.31 v123.19,66.04 | EXP_TRANS.8 v114.3,53.34 | v110.49,54.61 110.49,62.23 v113.03,64.77
  Bottom 0.406: v113.03,64.77 114.3,66.04 v123.19,66.04 | v114.3,53.34 111.76,53.34 v110.49,54.61
N$15  (via drill 0.35)
  Top 0.406: IC2.4 v30.16,44.45 | Q4.4 23.84,42.88 v24.13,43.18 R7.2
  Bottom 0.406: v30.16,44.45 27.94,44.45 26.67,43.18 v24.13,43.18
N$16
  Top 0.406: IC3.4 39.37,34.61 R8.2 39.37,33.97 39.37,27.32 Q2.4
N$17
  Top 0.406: LT_LED.1 17.78,36.83 18.62,37.68 Q4.MB 18.62,43.61 16.51,45.72 LT_LED1.1 LT_LED2.1
N$18  (via drill 0.35)
  Top 0.406: v27.94,24.13 27.94,19.05 RT_LED1.1 RT_LED2.1 RT_LED.1 | v38.1,24.13 41.48,24.13 Q2.MB
  Bottom 0.406: v27.94,24.13 v38.1,24.13
N$19
  Top 0.406: HD_LED.1 HD_LED1.1 15.24,58.42 16.51,57.15 22.86,57.15 23.7,56.3 Q6.MB
N$24  (via drill 0.35)
  Top 0.406: v16.51,59.69 Q1.MB
  Bottom 0.406: STRB_LED.1 12.7,30.48 12.7,58.42 13.97,59.69 v16.51,59.69
N$25  (via drill 0.35)
  Top 0.406: Q5.MB 56.3,26.67 v54.61,26.67 | v52.07,26.67 52.07,17.78 53.34,16.51 BRK_LED.1
  Bottom 0.406: v54.61,26.67 v52.07,26.67
N$28  (via drill 0.35)
  Top 0.406: IC2.1 26.73,39.35 26.69,39.35 26.69,45.74 27.94,46.99 27.94,53.34 v24.13,57.15 | IC1.4 24.13,69.56 v24.13,60.96
  Bottom 0.406: v24.13,60.96 v24.13,57.15
N$29  (via drill 0.35)
  Top 0.406: IC3.2 31.75,35.56 31.75,49.53 v30.48,50.8 | IC7.4 30.8,56.2 30.48,55.88 v30.48,53.34
  Bottom 0.406: v30.48,53.34 v30.48,50.8
N$31
  Bottom 1.27: HRN_PWR.2 HRN_LED.2
N$32  (via drill 1.27 pad 1.4)
  Top 1.27: R14.2 72.07,21.46 72.07,16.83 v72.39,16.51
  Bottom 1.27: v72.39,16.51 HRN_LED.1
N$33
  Top 1.27: R14.1 69.75,27.52 Q3.MB
RGN_BRK  (via drill 0.35)
  Top 0.406: v171.45,27.94 180.33,27.94 RGN_BRK_CONN.3 | JP1.10 v163.83,33.02
  Bottom 0.406: v171.45,27.94 171.45,31.75 170.18,33.02 v163.83,33.02
RX  (via drill 0.35)
  Top 0.406: v49.53,68.58 v49.53,55.88
  Bottom 0.406: JP5.3 49.6,68.65 v49.53,68.58 | JP2.4 v49.53,55.88
SCK  (via drill 0.35)
  Top 0.406: EXP_TRANS.13 v127,55.88 | JP1.6 v153.67,54.61
  Bottom 0.406: v153.67,54.61 152.4,55.88 v127,55.88
SCK_LOG  (via drill 0.35)
  Top 0.406: SPI_LCD_CONN.7 107.95,67.83 v107.95,66.04 | v96.72,64.77 96.54,64.59 96.54,62.96 96.52,62.94 LOGG_TRANS.13
  Bottom 0.406: v107.95,66.04 106.68,64.77 v96.72,64.77
SCL_LOG  (via drill 0.35)
  Top 0.406: v96.52,38.1 R12.2 96.2,35.56 93.98,35.56 93.09,34.67 DASH_IN.4 | v54.61,39.37 v54.61,63.5 | v33.02,62.23 32.7,61.91 IC7.1
  Bottom 0.406: v96.52,38.1 JP4.11 82.55,39.37 v54.61,39.37 | v54.61,63.5 53.34,62.23 v33.02,62.23
SDA_LOG  (via drill 0.35)
  Top 0.406: JP4.12 83.82,34.29 82.55,33.02 82.55,18.67 DASH_IN.3 | v80.01,38.1 78.74,39.37 v78.74,52.07 | Q6.4 26.38,51.77 26.69,51.46 v26.69,50.8 | v29.21,52.07 29.53,52.39 R6.2 33.34,52.07 v34.83,52.07
  Bottom 0.406: JP4.12 81.28,38.1 v80.01,38.1 | v34.83,52.07 v78.74,52.07 | v26.69,50.8 27.94,50.8 v29.21,52.07
THROTTLE
  Top 0.406: BREAK/THROTTLE_CONN.3 168.9,27.94 167.64,27.94 166.37,29.21 JP1.11
TS3V555
  Top 0.406: TS3V555.5 24.07,35.82 C4.1
TX  (via drill 0.35)
  Top 0.406: v44.45,69.85 43.18,68.58 v43.18,54.61
  Bottom 0.406: JP5.2 61.93,69.85 v44.45,69.85 | v43.18,54.61 41.91,53.34 JP2.5

## Text on the board
tPlace: ADALOGGER | M0_EXPRESS | SPARE DIGITAL | GPS | SPARE ANALOG